# EAGLE board oresat0-minusz-end-cap (EAGLE 9.5.1)
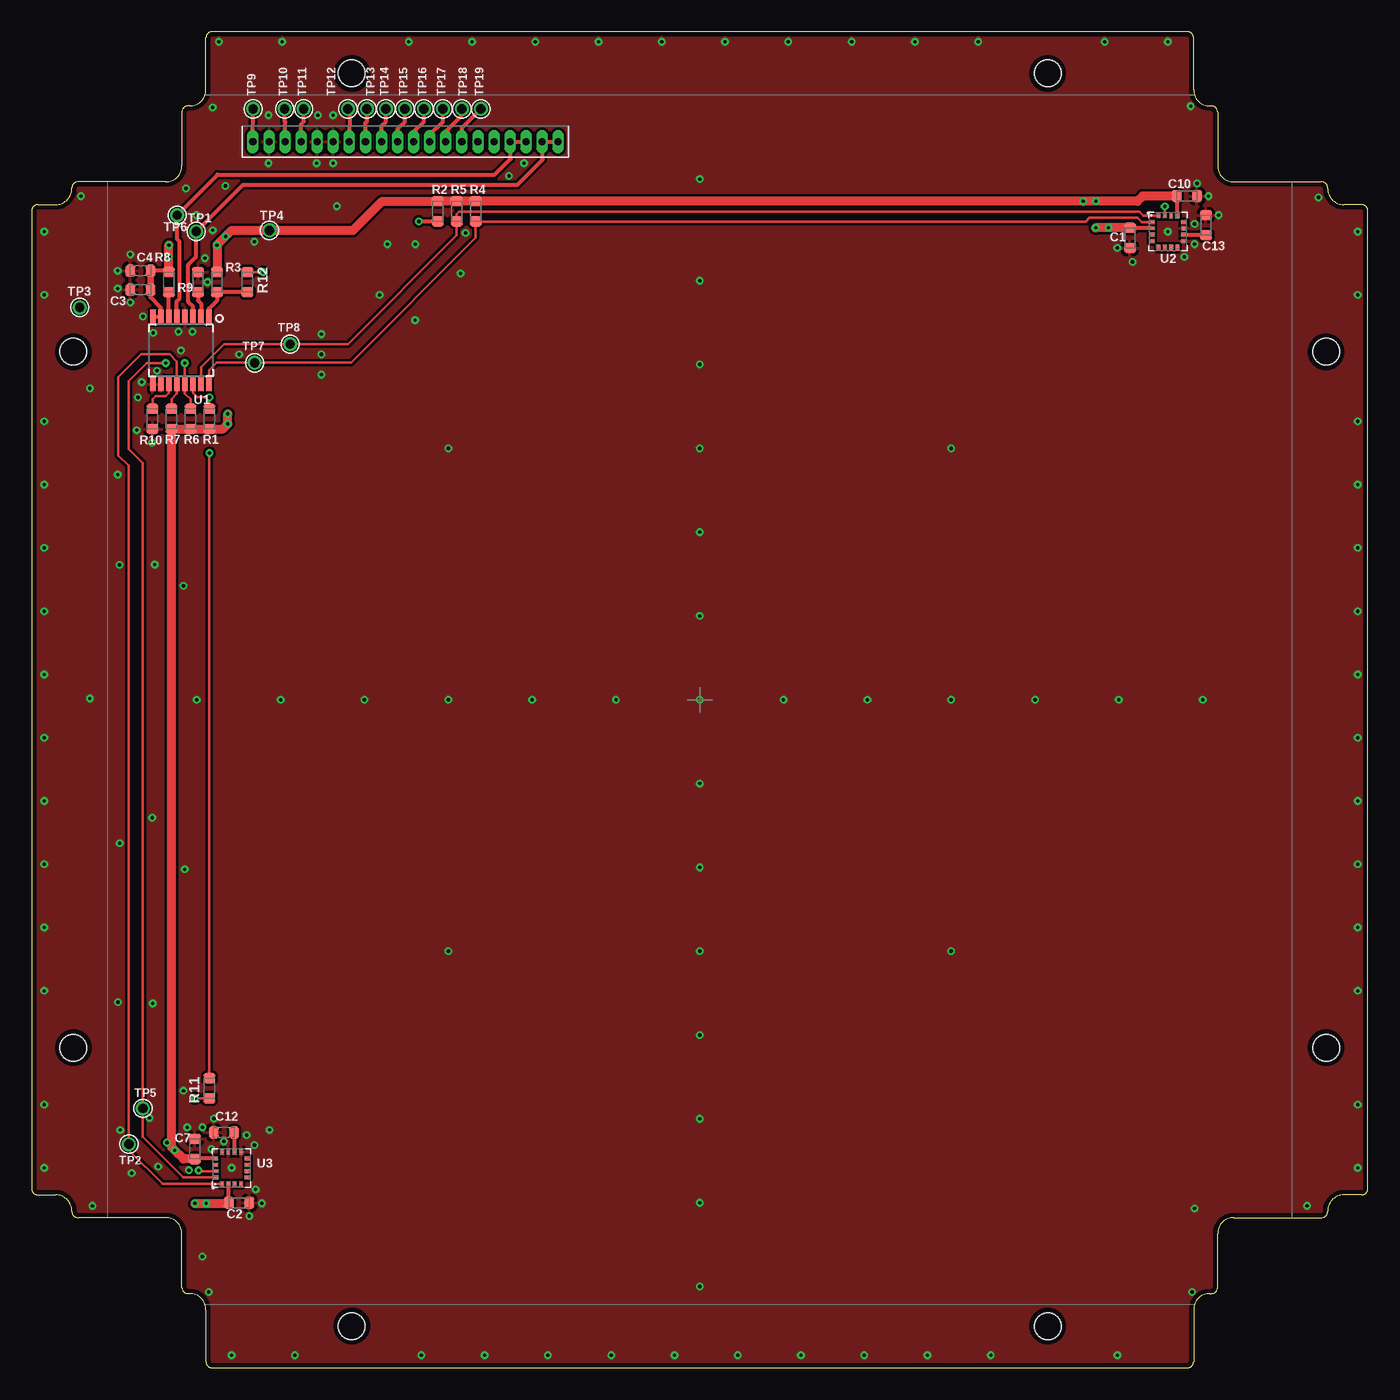
[diagram p0: board, top side]
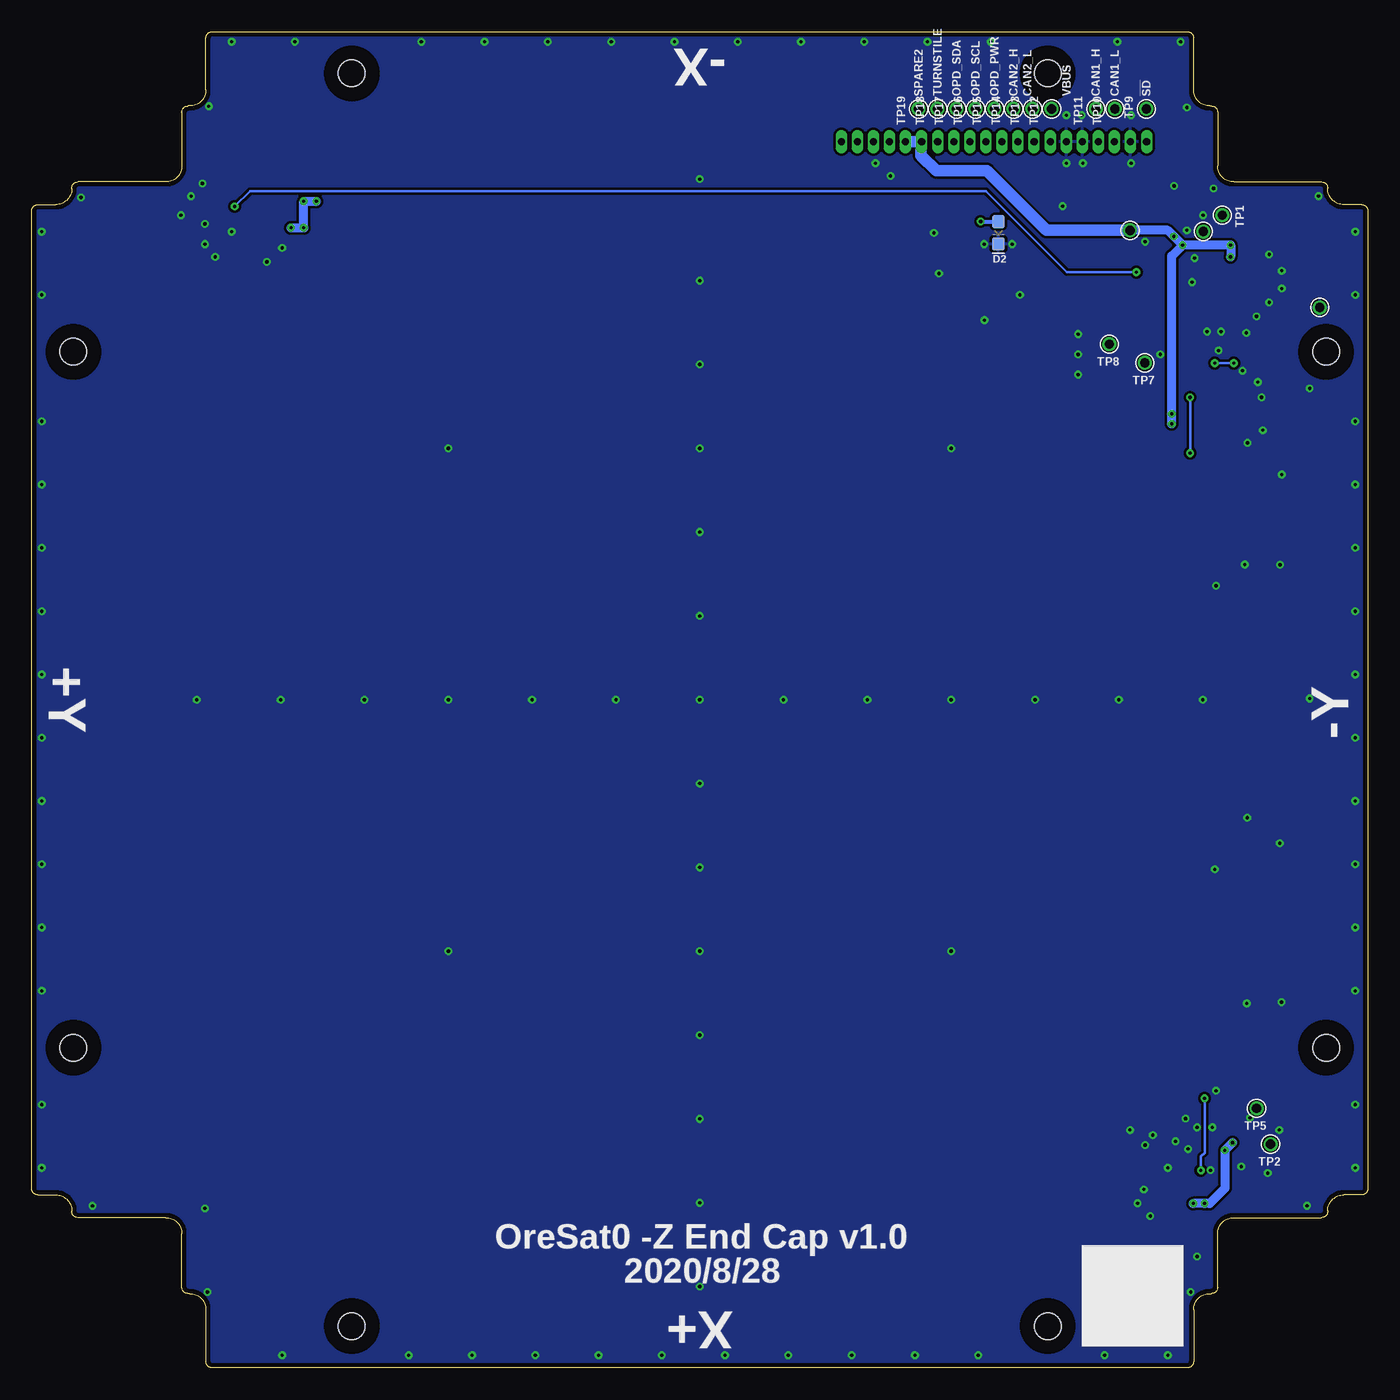
[diagram p1: board, bottom side, seen from below]

Size 105.6 x 105.6 mm. Coordinates in mm from the lower left corner, seen from the top.
Outline: 93.73,99.23 93.73,95 arc90 95,93.73 101.93,93.73 arc-90 102.43,93.23 102.43,93.2 arc90 103.7,91.93 105.1,91.93 arc-90 105.6,91.43 105.6,14.17 arc-90 105.1,13.67 103.7,13.67 arc90 102.43,12.4 102.43,12.37 arc-90 101.93,11.87 95,11.87 arc90 93.73,10.6 93.73,6.37 arc-90 93.23,5.87 93.1,5.87 arc90 91.83,4.6 91.83,0.5 arc-90 91.33,0 14.27,0 arc-90 13.77,0.5 13.77,4.6 arc90 12.5,5.87 12.37,5.87 arc-90 11.87,6.37 11.87,10.6 arc90 10.6,11.87 3.67,11.87 arc-90 3.17,12.37 3.17,12.4 arc90 1.9,13.67 0.5,13.67 arc-90 0,14.17 0,91.43 arc-90 0.5,91.93 1.9,91.93 arc90 3.17,93.2 3.17,93.23 arc-90 3.67,93.73 10.6,93.73 arc90 11.87,95 11.87,99.23 arc-90 12.37,99.73 12.5,99.73 arc90 13.77,101 13.77,105.1 arc-90 14.27,105.6 91.33,105.6 arc-90 91.83,105.1 91.83,101 arc90 93.1,99.73 93.23,99.73 arc-90 93.73,99.23
Copper layers (1*16): Top 0.0356mm / dielectric 1.5011mm / Bottom 0.0356mm
Design rules "OSH-Park-2-layer *": minimum track width 6mil, minimum drill 10mil, track to track 6mil, track to pad 6mil, pad to pad 6mil, via to via 6mil, smd to smd 6mil, copper to edge 15mil, drill to drill 6mil, minimum pad ring 7mil, minimum via ring 7mil, stop-mask expansion 3mil, vias tented up to drill 10mil, thermal gap 10mil
Holes 2.1 mm at 102.3,25.3 80.3,3.3 25.3,3.3 3.3,25.3 3.3,80.3 25.3,102.3 80.3,102.3 102.3,80.3
bRestrict: area 100.3,23.3 to 104.3,27.3; area 78.3,1.3 to 82.3,5.3; area 23.3,1.3 to 27.3,5.3; area 1.3,23.3 to 5.3,27.3; area 1.3,78.3 to 5.3,82.3; area 23.3,100.3 to 27.3,104.3; area 78.3,100.3 to 82.3,104.3; area 100.3,78.3 to 104.3,82.3

## Footprints (pad centres in the part's own frame; a part is rotated, then mirrored left to right if it is on the bottom)
.0603-B-NOSILK = smd 0.8 x 0.95: 1 -0.8,0; 2 0.8,0
LED-0603 = smd 1 x 1: A -0.877,0; C 0.877,0
6-104178-1 = drill 0.56 pad 0.9 long: 1 -12.065,0; 2 -10.795,0; 3 -9.525,0; 4 -8.255,0; 5 -6.985,0; 6 -5.715,0; 7 -4.445,0; 8 -3.175,0; 9 -1.905,0; 10 -0.635,0; 11 0.635,0; 12 1.905,0; 13 3.175,0; 14 4.445,0; 15 5.715,0; 16 6.985,0; 17 8.255,0; 18 9.525,0; 19 10.795,0; 20 12.065,0
1X01 = drill 0.737 pad 1.1: 1 0,0
16-SSOP = smd 0.419 x 1.143: 1 -2.223,-2.654; 2 -1.587,-2.654; 3 -0.953,-2.654; 4 -0.318,-2.654; 5 0.318,-2.654; 6 0.953,-2.654; 7 1.587,-2.654; 8 2.223,-2.654; 9 2.223,2.654; 10 1.587,2.654; 11 0.953,2.654; 12 0.318,2.654; 13 -0.318,2.654; 14 -0.953,2.654; 15 -1.587,2.654; 16 -2.223,2.654
LGA-16(3X3) = smd 0.3 x 0.45: 1 0.75,1.275; 2 0.25,1.275; 3 -0.25,1.275; 4 -0.75,1.275; 9 -0.75,-1.275; 10 -0.25,-1.275; 11 0.25,-1.275; 12 0.75,-1.275 | smd 0.45 x 0.3: 5 -1.275,0.75; 6 -1.275,0.25; 7 -1.275,-0.25; 8 -1.275,-0.75; 13 1.275,-0.75; 14 1.275,-0.25; 15 1.275,0.25; 16 1.275,0.75

## Placement (x,y rotation side)
C1  100n  [.0603-B-NOSILK]  86.8,89.3 270 top
C2  100n  [.0603-B-NOSILK]  16.4,13.05 180 top
C3  100n  [.0603-B-NOSILK]  8.6,85.2 180 top
C4  10u  [.0603-B-NOSILK]  8.6,86.7 180 top
C7  100n  [.0603-B-NOSILK]  12.9,17.3 90 top
C10  100n  [.0603-B-NOSILK]  91.3,92.6 0 top
C12  10u  [.0603-B-NOSILK]  15.2,18.6 180 top
C13  10u  [.0603-B-NOSILK]  92.8,90.3 90 top
D2  GREEN  [LED-0603]  29.2,89.7 270 bottom
J1  6-104178-1  [6-104178-1]  29.55,96.9 0 top
R1  4.7k  [.0603-B-NOSILK]  14.05,75 270 top
R2  2.7k  [.0603-B-NOSILK]  32.1,91.4 90 top
R3  4.7k  [.0603-B-NOSILK]  14.65,85.8 90 top
R4  4.7k  [.0603-B-NOSILK]  35.1,91.4 90 top
R5  4.7k  [.0603-B-NOSILK]  33.6,91.4 90 top
R6  4.7k  [.0603-B-NOSILK]  12.55,75 270 top
R7  4.7k  [.0603-B-NOSILK]  11.05,75 270 top
R8  4.7k  [.0603-B-NOSILK]  10.85,85.8 90 top
R9  4.7k  [.0603-B-NOSILK]  13.15,85.8 270 top
R10  4.7k  [.0603-B-NOSILK]  9.55,75 90 top
R11  NP  [.0603-B-NOSILK]  14.05,22.1 90 top
R12  NP  [.0603-B-NOSILK]  17.05,85.8 270 top
TP1  TEST-POINT-LARGE-SQUARE  [1X01]  11.5,91.1 270 top
TP2  TEST-POINT-LARGE-SQUARE  [1X01]  7.68,17.68 0 top
TP3  TEST-POINT-LARGE-SQUARE  [1X01]  3.8,83.8 270 top
TP4  TEST-POINT-LARGE-SQUARE  [1X01]  18.8,89.9 270 top
TP5  TEST-POINT-LARGE-SQUARE  [1X01]  8.79,20.51 0 top
TP6  TEST-POINT-LARGE-SQUARE  [1X01]  13,89.8 180 top
TP7  TEST-POINT-LARGE-SQUARE  [1X01]  17.62,79.42 0 top
TP8  TEST-POINT-LARGE-SQUARE  [1X01]  20.43,80.9 0 top
TP9  TEST-POINT-LARGE-SQUARE  [1X01]  17.5,99.5 90 top
TP10  TEST-POINT-LARGE-SQUARE  [1X01]  20,99.5 90 top
TP11  TEST-POINT-LARGE-SQUARE  [1X01]  21.5,99.5 90 top
TP12  TEST-POINT-LARGE-SQUARE  [1X01]  25,99.5 90 top
TP13  TEST-POINT-LARGE-SQUARE  [1X01]  26.5,99.5 90 top
TP14  TEST-POINT-LARGE-SQUARE  [1X01]  28,99.5 90 top
TP15  TEST-POINT-LARGE-SQUARE  [1X01]  29.5,99.5 90 top
TP16  TEST-POINT-LARGE-SQUARE  [1X01]  31,99.5 90 top
TP17  TEST-POINT-LARGE-SQUARE  [1X01]  32.5,99.5 90 top
TP18  TEST-POINT-LARGE-SQUARE  [1X01]  34,99.5 90 top
TP19  TEST-POINT-LARGE-SQUARE  [1X01]  35.5,99.5 90 top
U1  LTC4305  [16-SSOP]  11.8,80.4 180 top
U2  MMC5883MA  [LGA-16(3X3)]  89.8,89.8 90 top
U3  MMC5883MA  [LGA-16(3X3)]  15.8,15.8 180 top

## Library data of the parts
C1-C3 C7 C10 = oresat-rcl; DIS: Digi-Key; DPN: 1276-CL10B104KB8NNNLCT-ND; MFR: Samsung; MPN: CL10B104KB8NNNL
C4 C12 C13 = oresat-rcl; DIS: Digi-Key; DPN: 490-14461-1-ND; MFR: Murata; MPN: GRM188D71A106KA73D
D2 = SparkFun-LED; DIS: Digi-Key; DPN: 511-1584-1-ND; MFR: Rohm; MPN: SML-E12M8WT86; PROD_ID: DIO-00821
J1 = J-TE-6-104178-1-1.27mm-male-th; DIS: Digi-Key; DPN: 952-3875-1-ND; MFR: TE Connectivity; MPN: 6-104178-1
R1 R3-R10 = oresat-rcl; DIS: Digi-Key; DPN: A12969CT-ND; MFR: TE Connectivity; MPN: CRGCQ0603F4K7
R2 = oresat-rcl; DIS: Digi-Key; DPN: A129693CT-ND; MFR: TE Connectivity; MPN: CRGCQ0603F2K7
R11 R12 = oresat-rcl
TP1-TP19 = oresat-misc
U1 = U-Linear-LTC4305-2-Channel-Bus-Multiplexer; DIS: Digi-Key; DPN: LTC4305IGN#PBF-ND; MFR: Analog; MPN: LTC4305IGN#PBF
U2 U3 = U-Memsic-MMC5883-3-Axis-Magnetometer; DIS: Digi-Key; DPN: 1267-1072-1-ND; MFR: Memsic; MPN: MMC5883MA

## Nets
3.3V: C1.1 C2.2 C3.1 C4.1 C7.1 C10.1 J1.15 J1.16 R1.2 R2.2 R3.2 R4.2 R5.2 R6.2 R7.2 R8.2 TP4.1 U1.7 U1.8 U2.2 U2.13 U3.2 U3.13
!SD: J1.1 TP9.1
CAN1_H: J1.4 TP11.1
CAN1_L: J1.3 TP10.1
CAN2_H: J1.9 TP14.1
CAN2_L: J1.8 TP13.1
GND: C1.2 C2.1 C3.2 C4.2 C7.2 C10.2 C12.2 C13.2 D2.C J1.2 J1.5 J1.6 R9.1 R10.1 TP3.1 U1.4 U1.9 U1.10 U2.9 U2.11 U3.9 U3.11
I2C-SCL: J1.17 J1.18 TP1.1 U1.5
I2C-SDA: J1.19 J1.20 TP6.1 U1.3
N$1: R8.1 U1.6
N$2: C12.1 U3.10
N$3: R1.1 R11.2 U1.14
N$4: R3.1 R12.2 U1.1
N$5: C13.1 U2.10
N$6: R9.2 U1.2
N$7: R10.2 U1.11
N$8: R11.1 U3.15
N$10: R12.1 U2.15
N$271: D2.A R2.1
OPD_PWR: J1.10 TP15.1
OPD_SCL: J1.11 TP16.1
OPD_SDA: J1.12 TP17.1
SCL1: R7.1 TP2.1 U1.12 U3.1
SCL2: R4.1 TP7.1 U1.16 U2.1
SDA1: R6.1 TP5.1 U1.13 U3.16
SDA2: R5.1 TP8.1 U1.15 U2.16
SPARE1-TURNSTYLE-DPLY: J1.13 TP18.1
SPARE2: J1.14 TP19.1
VBUS: J1.7 TP12.1

## Tracks (layer width: path | path; a pad name or v marks a point on that pad's centre or on a via)
3.3V  (via drill 0.25)
  Top 0.3: C3.1 9.4,84.6 10.21,83.79 U1.7 U1.8 | R8.2 10.75,86.7 C4.1 | U3.2 15.55,13.1 C2.2 | U3.13 12.95,16.55 C7.1 | U2.13 90.55,92.55 C10.1 | U2.2 86.85,90.05 C1.1
  Top 0.5: C3.1 C4.1
  Top 0.7: C7.1 12,16.5 v11.3,17.2 11.05,17.45 R7.2 R6.2 R1.2 15.1,74.2 v15.5,74.6 v15.5,75.4 | v12.9,13 15.55,13 C2.2 | R3.2 v14.65,88.72 v14.64,88.73 15.81,89.9 TP4.1 25.4,89.9 27.7,92.2 R2.2 R5.2 R4.2 v83.1,92.2 87.4,92.2 87.8,92.6 C10.1 | R8.2 v10.85,88.73 | C1.1 v84.1,90.1
  Bottom 0.7: v10.7,17.8 v11.3,17.2 11.3,14.2 12.5,13 v12.9,13 v13.8,13 | v14.64,88.73 v10.85,88.73 v10.85,87.8 | v14.64,88.73 v15.33,89.42 15.81,89.9 TP4.1 | v15.5,74.6 15.5,87.87 v14.64,88.73 | v85.1,90.1 v84.1,90.1 v84.1,92.2 v83.1,92.2
  Bottom 0.9: TP4.1 25.4,89.9 30.1,94.6 34.1,94.6 35.31,95.81 J1.15 J1.16
!SD
  Top 0.3: J1.1 TP9.1
CAN1_H
  Top 0.3: J1.4 21.31,98.31 21.5,98.5 TP11.1
CAN1_L
  Top 0.3: J1.3 20.04,98.46 20,98.5 TP10.1
CAN2_H
  Top 0.3: J1.9 27.66,98.16 28,98.5 TP14.1
CAN2_L
  Top 0.3: J1.8 26.39,98.39 26.5,98.5 TP13.1
GND  (via drill 0.25)
  other vias: 24.12,91.8 15.8,15.8 17.6,17.6 14.2,17.3 14.4,19.7 17.7,14.1 18.2,13 91.9,12.6 9.56,28.8 12.7,81.9 30.32,88.8 28.12,88.8 1,15.8 1,20.8 1,29.8 1,34.8 1,39.8 1,44.8 1,49.8 1,54.8 1,59.8 1,64.8 1,69.8 1,74.8 1,89.8 1,84.8 104.8,15.8 104.8,20.8 104.8,29.8 104.8,34.8 104.8,39.8 104.8,44.8 104.8,49.8 104.8,54.8 104.8,59.8 104.8,64.8 104.8,69.8 104.8,74.8 104.8,89.8 104.8,84.8 14.8,104.8 19.8,104.8 29.8,104.8 34.8,104.8 39.8,104.8 44.8,104.8 49.8,104.8 54.8,104.8 59.8,104.8 64.8,104.8 69.8,104.8 74.8,104.8 84.8,104.8 89.8,104.8 15.8,1 20.8,1 30.8,1 35.8,1 40.8,1 45.8,1 50.8,1 55.8,1 60.8,1 65.8,1 70.8,1 75.8,1 85.8,1 89.8,89.8 87,87.4 85.8,88.5 93.8,91.1 93,92.6 91.9,90.4 12.2,93.2 91.9,88.8 91.1,87.8 17.2,12 17,18.4 3.9,92.6 14.3,99.6 91.6,99.7 92.1,93.6 101.7,92.5 100.8,12.8 91.7,6 18.8,18.8 14,6 4.8,12.8 13.5,19 12.3,19 8.8,83.1 13.5,8.8 17.6,89 15.2,17.9 12.43,15.62 9.31,19.76 9.5,73.1 8.3,74.1 8.7,77.9 8.4,76.7 9.6,81.8 7.8,84.2 6.8,85.3 6.8,86.7 7.8,88 4.6,77.4 6.94,63.46 4.6,52.9 6.96,41.47 6.83,28.91 9.53,43.47 6.8,70.6 12,21.9 12.1,39.4 12,61.8 11.6,81.9 13.9,85.8 13.7,87.7 14.3,89.9 52.8,93.95 52.8,85.92 52.8,79.3 52.8,72.67 52.8,66.05 52.8,59.42 52.8,52.8 52.8,46.17 52.8,39.55 52.8,32.92 52.8,26.3 52.8,19.68 52.8,13.05 52.8,6.42 13.05,52.8 19.68,52.8 26.3,52.8 32.92,52.8 39.55,52.8 46.17,52.8 59.42,52.8 66.05,52.8 72.67,52.8 79.3,52.8 85.92,52.8 92.55,52.8 72.67,72.67 32.92,72.67 32.92,32.92 72.67,32.92 13.02,91.1 15.32,93.4 37.72,94.2 38.92,95.2 22.52,95.2 23.82,95.2 23.82,99 22.62,99 18.72,95.2 18.72,99 9.9,78.8 11.8,80.4 16.4,80.1 22.9,80.1 34.3,89.7 30.3,82.8 22.9,81.7 22.9,78.5 33.9,86.5 27.5,84.8 10,15.9 7.9,15.4 7,18.8 9.73,63.49
  pour Top (isolate 0.2, rank 6): 0,0 105.6,0 105.6,105.6 0,105.6
  pour Bottom (isolate 0.2, rank 6): 0,0 105.6,0 105.6,105.6 0,105.6
I2C-SCL
  Top 0.3: U1.5 11.48,84.28 11.7,84.5 11.7,89 11.5,89.2 TP1.1 14.7,94.3 36.6,94.3 37.85,95.56 J1.17 J1.18
I2C-SDA
  Top 0.3: U1.3 12.75,83.85 12.37,84.23 12.37,87.17 13,87.8 TP6.1 16.7,93.5 38.4,93.5 40.4,95.5 J1.19 J1.20
N$1
  Top 0.3: U1.6 R8.1
N$2
  Top 0.2: 16.05,18.55 C12.1
  Top 0.3: U3.10 16.05,18.55
N$3  (via drill 0.25)
  Top 0.2: U1.14 12.75,77.05 13.1,76.7 v14.05,76.7 R1.1 | v14.05,72.3 R11.2
  Bottom 0.2: v14.05,76.7 v14.05,72.3
N$4
  Top 0.3: U1.1 14.02,83.72 14.65,84.35 R3.1 R12.2
N$5
  Top 0.3: U2.10 92.75,89.55 C13.1
N$6
  Top 0.3: R9.2 13.15,84.35 13.39,84.11 U1.2
N$7
  Top 0.2: R10.2 9.55,76.55 9.8,76.8 10.6,76.8 10.85,77.05 U1.11
N$8  (via drill 0.25)
  Top 0.2: U3.15 13.25,15.55 v13.19,15.61 | v12.9,21.3 R11.1
  Bottom 0.2: v13.19,15.61 13.19,16.71 12.9,17 v12.9,21.3
N$10  (via drill 0.25)
  Top 0.2: U2.15 v89.55,91.79 | v18.3,86.6 R12.1
  Bottom 0.2: v89.55,91.79 88.34,93 30.2,93 23.8,86.6 v18.3,86.6
N$271  (via drill 0.25)
  Top 0.3: R2.1 v30.6,90.6
  Bottom 0.3: v30.6,90.6 29.22,90.6 D2.A
OPD_PWR
  Top 0.3: J1.10 28.93,97.93 29.5,98.5 TP15.1
OPD_SCL
  Top 0.3: J1.11 30.2,97.7 31,98.5 TP16.1
OPD_SDA
  Top 0.3: J1.12 31.47,97.47 32.5,98.5 TP17.1
SCL1
  Top 0.2: R7.1 11.05,76.55 11.48,76.98 U1.12 11.48,79.52 10.9,80.1 8.67,80.1 6.86,78.29 6.86,72.11 7.68,71.29 TP2.1 7.68,17.2 10.36,14.53 U3.1
SCL2
  Top 0.2: U1.16 14.02,78.85 14.62,79.45 17.6,79.45 | 17.6,79.45 TP7.1 | 17.6,79.45 25.25,79.45 35.1,89.3 R4.1 83.3,90.6 83.6,90.9 87.4,90.9 87.75,90.55 U2.1
SDA1  (via drill 0.25)
  Top 0.2: R6.1 12.55,76.55 12.1,77 12.1,77.73 U1.13 12.1,77.76 v12.1,79.4 | v10.6,79.4 9.1,79.4 7.67,77.97 7.67,72.61 8.79,71.49 TP5.1 8.79,18.24 11.97,15.05 U3.16
  Bottom 0.2: v12.1,79.4 v10.6,79.4
SDA2
  Top 0.2: U1.15 13.39,79.09 15.2,80.9 TP8.1 25,80.9 33.6,89.5 R5.1 33.6,91.17 33.8,91.38 87.55,91.38 87.85,91.08 U2.16
SPARE1-TURNSTYLE-DPLY
  Top 0.3: J1.13 32.74,97.74 34,99 TP18.1
SPARE2
  Top 0.3: J1.14 34.01,98.01 TP19.1
VBUS
  Top 0.3: TP12.1 25.12,99.38 J1.7

## Text on the board
bPlace: -X | !SD | CAN1_L | CAN1_H | VBUS | CAN2_L | CAN2_H | OPD_PWR | OPD_SCL | OPD_SDA | TURNSTILE | SPARE2 | +Y | -Y | OreSat0 -Z End Cap v1.0 | 2020/8/28 | +X